# Altium PCB keybo.PcbDoc
Units mil, origin at the board's own origin, x right, y up, seen from the top; angles counter-clockwise.
Board outline 14245 x 5020 mil, 2 copper layers (Top Layer, Bottom Layer); 106 components, 46 nets, 503 pads, 18 vias.
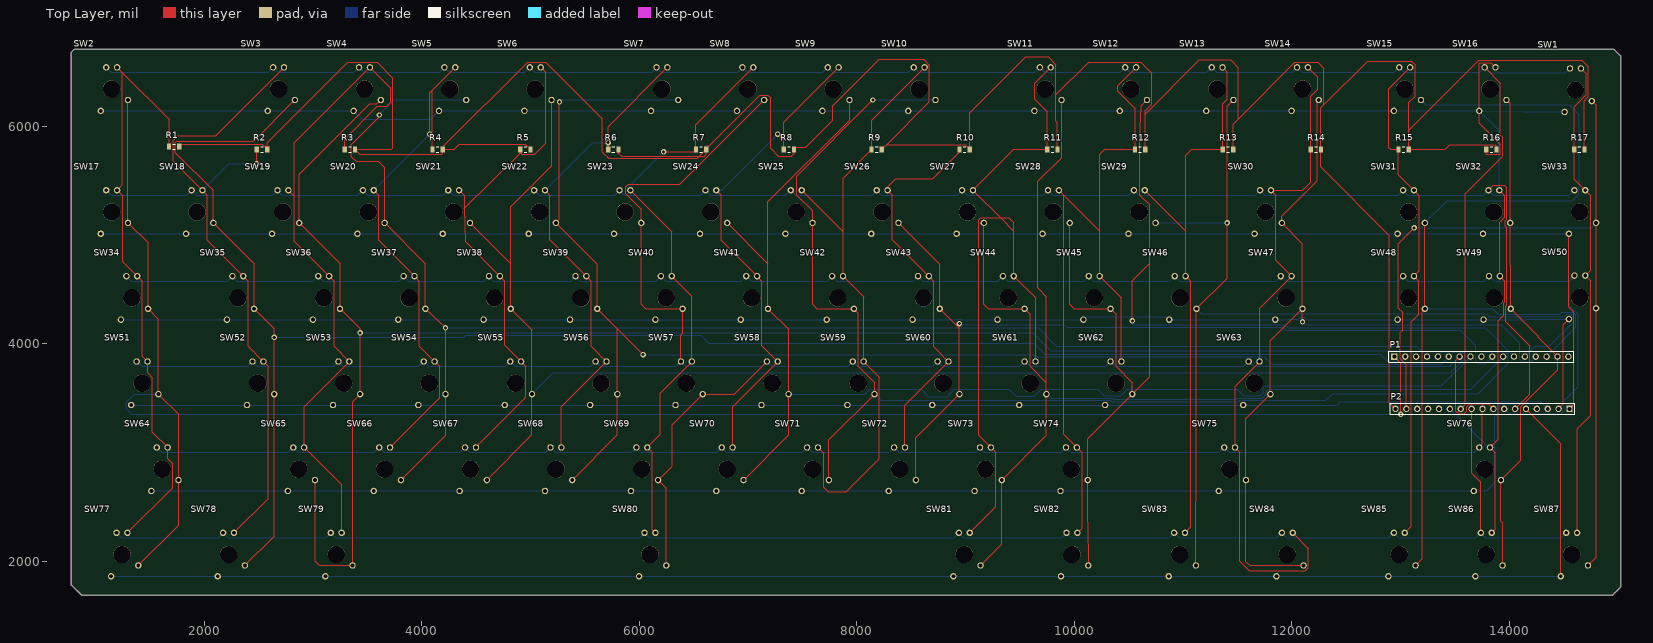
[diagram p0: Top Layer view]
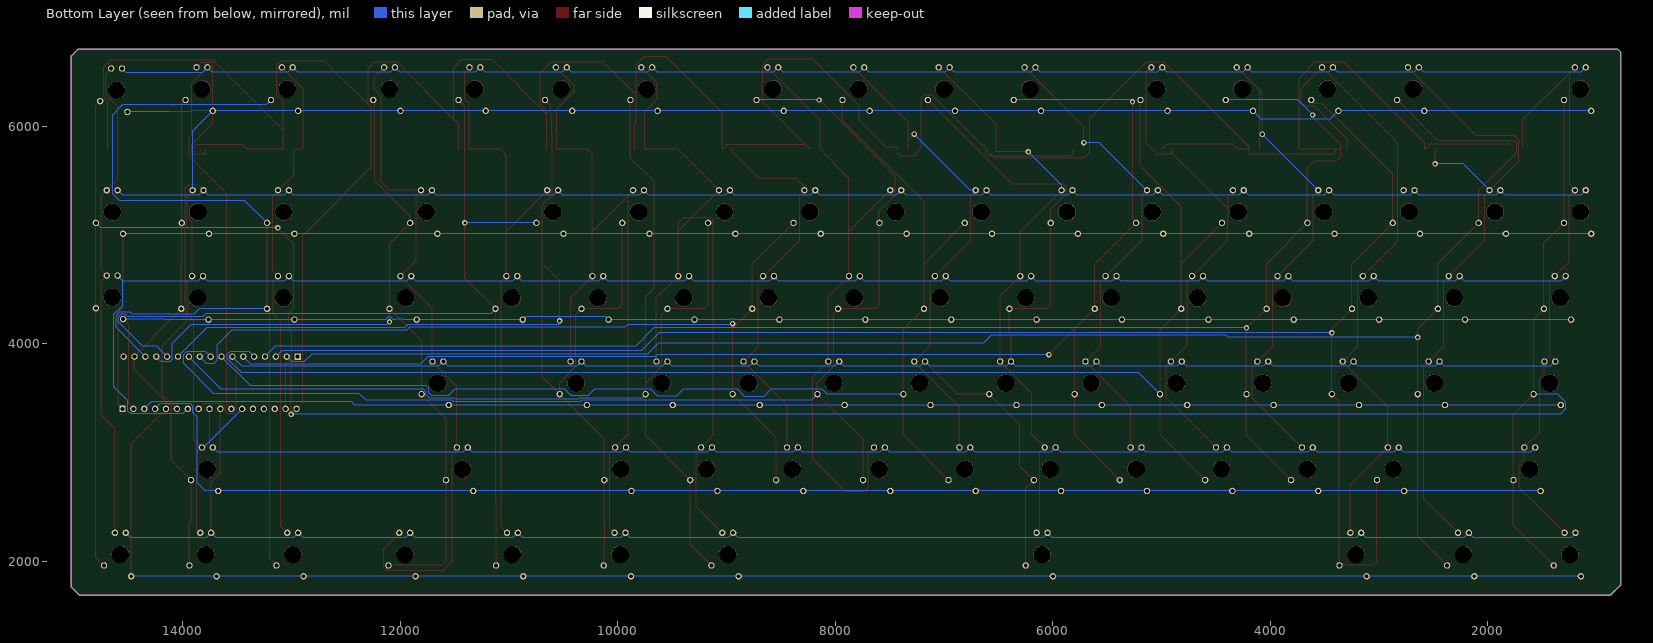
[diagram p1: Bottom Layer view, seen from below]

## Layer stack, top to bottom
Top Solder: solder mask 0.4, Solder Resist, Dk 3.5
Top Layer: signal copper 1.4
Dielectric 1: dielectric 12.6, FR-4, Dk 4.8
Bottom Layer: signal copper 1.4
Bottom Solder: solder mask 0.4, Solder Resist, Dk 3.5

## Board outline
875,1685 780,1780 780,6680 805,6705 14965,6705 15025,6645 15025,1760 14950,1685

## Design rules (kind name [scope] priority, off if disabled: settings)
Clearance [All] p1: gap=10 ignorepadtopadclearanceinfootprint=FALSE except(0: Arc-Hole Track-Hole SMDPad-Hole THPad-Hole Via-Hole Fill-Hole Poly-Hole Region-Hole Text-Hole)
PolygonConnect [All] p1: connectstyle=Relief reliefconductorwidth=10 reliefentries=4 polygonreliefangle="90 Angle" airgapwidth=10
RoutingVias [All] p1: holewidth=28 width=50 viastyle="Through Hole" minholewidth=28 minwidth=50 maxholewidth=28 maxwidth=50
SolderMaskExpansion [All] p1: expansion=4
Width [All] p1: maxlimit=10 minlimit=10 preferedwidth=10
30 further rules are at their usual default settings.

## Components (designator, comment, footprint, x,y, rotation, side; value= is the part's Value field where it differs from the comment)
P1 "Header 17" HDR1X17 12945,3880 r0 top
P2 "Header 17" HDR1X17 14555,3400 r180 top
R1 "Res" R2012 1725,5810 r0 top
R2 "Res" R2012 2532.5,5785 r0 top
R3 "Res" R2012 3340,5785 r0 top
R4 "Res" R2012 4147.5,5785 r0 top
R5 "Res" R2012 4955,5785 r0 top
R6 "Res" R2012 5762.5,5785 r0 top
R7 "Res" R2012 6570,5785 r0 top
R8 "Res" R2012 7377.5,5785 r0 top
R9 "Res" R2012 8185,5785 r0 top
R10 "Res" R2012 8992.5,5785 r0 top
R11 "Res" R2012 9800,5785 r0 top
R12 "Res" R2012 10607.5,5785 r0 top
R13 "Res" R2012 11415,5785 r0 top
R14 "Res" R2012 12222.5,5785 r0 top
R15 "Res" R2012 13030,5785 r0 top
R16 "Res" R2012 13837.5,5785 r0 top
R17 "Res" R2012 14645,5785 r0 top
SW1 "MX_SW" MX_SW-2 14610,6330 r180 top
SW2 "MX_SW" MX_SW-2 1150,6340 r180 top
SW3 "MX_SW" MX_SW-2 2685,6340 r180 top
SW4 "MX_SW" MX_SW-2 3475,6340 r180 top
SW5 "MX_SW" MX_SW-2 4260,6340 r180 top
SW6 "MX_SW" MX_SW-2 5045,6340 r180 top
SW7 "MX_SW" MX_SW-2 6210,6340 r180 top
SW8 "MX_SW" MX_SW-2 7000,6340 r180 top
SW9 "MX_SW" MX_SW-2 7785,6340 r180 top
SW10 "MX_SW" MX_SW-2 8575,6340 r180 top
SW11 "MX_SW" MX_SW-2 9735,6340 r180 top
SW12 "MX_SW" MX_SW-2 10520,6340 r180 top
SW13 "MX_SW" MX_SW-2 11315,6340 r180 top
SW14 "MX_SW" MX_SW-2 12100,6340 r180 top
SW15 "MX_SW" MX_SW-2 13040,6340 r180 top
SW16 "MX_SW" MX_SW-2 13825,6340 r180 top
SW17 "MX_SW" MX_SW-2 1150,5210 r180 top
SW18 "MX_SW" MX_SW-2 1935,5210 r180 top
SW19 "MX_SW" MX_SW-2 2725,5210 r180 top
SW20 "MX_SW" MX_SW-2 3510,5210 r180 top
SW21 "MX_SW" MX_SW-2 4295,5210 r180 top
SW22 "MX_SW" MX_SW-2 5085,5210 r180 top
SW23 "MX_SW" MX_SW-2 5870,5210 r180 top
SW24 "MX_SW" MX_SW-2 6660,5210 r180 top
SW25 "MX_SW" MX_SW-2 7445,5210 r180 top
SW26 "MX_SW" MX_SW-2 8235,5210 r180 top
SW27 "MX_SW" MX_SW-2 9020,5210 r180 top
SW28 "MX_SW" MX_SW-2 9810,5210 r180 top
SW29 "MX_SW" MX_SW-2 10600,5210 r180 top
SW30 "MX_SW" MX_SW-2 11760,5210 r180 top
SW31 "MX_SW" MX_SW-2 13075,5210 r180 top
SW32 "MX_SW" MX_SW-2 13860,5210 r180 top
SW33 "MX_SW" MX_SW-2 14650,5210 r180 top
SW34 "MX_SW" MX_SW-2 1335,4420 r180 top
SW35 "MX_SW" MX_SW-2 2310,4420 r180 top
SW36 "MX_SW" MX_SW-2 3100,4420 r180 top
SW37 "MX_SW" MX_SW-2 3885,4420 r180 top
SW38 "MX_SW" MX_SW-2 4670,4420 r180 top
SW39 "MX_SW" MX_SW-2 5465,4420 r180 top
SW40 "MX_SW" MX_SW-2 6250,4420 r180 top
SW41 "MX_SW" MX_SW-2 7035,4420 r180 top
SW42 "MX_SW" MX_SW-2 7825,4420 r180 top
SW43 "MX_SW" MX_SW-2 8615,4420 r180 top
SW44 "MX_SW" MX_SW-2 9395,4420 r180 top
SW45 "MX_SW" MX_SW-2 10185,4420 r180 top
SW46 "MX_SW" MX_SW-2 10975,4420 r180 top
SW47 "MX_SW" MX_SW-2 11950,4420 r180 top
SW48 "MX_SW" MX_SW-2 13075,4420 r180 top
SW49 "MX_SW" MX_SW-2 13865,4420 r180 top
SW50 "MX_SW" MX_SW-2 14650,4425 r180 top
SW51 "MX_SW" MX_SW-2 1430,3635 r180 top
SW52 "MX_SW" MX_SW-2 2495,3635 r180 top
SW53 "MX_SW" MX_SW-2 3285,3635 r180 top
SW54 "MX_SW" MX_SW-2 4070,3635 r180 top
SW55 "MX_SW" MX_SW-2 4865,3635 r180 top
SW56 "MX_SW" MX_SW-2 5650,3635 r180 top
SW57 "MX_SW" MX_SW-2 6435,3635 r180 top
SW58 "MX_SW" MX_SW-2 7225,3635 r180 top
SW59 "MX_SW" MX_SW-2 8015,3635 r180 top
SW60 "MX_SW" MX_SW-2 8795,3635 r180 top
SW61 "MX_SW" MX_SW-2 9595,3635 r180 top
SW62 "MX_SW" MX_SW-2 10385,3635 r180 top
SW63 "MX_SW" MX_SW-2 11655,3635 r180 top
SW64 "MX_SW" MX_SW-2 1615,2845 r180 top
SW65 "MX_SW" MX_SW-2 2870,2845 r180 top
SW66 "MX_SW" MX_SW-2 3660,2845 r180 top
SW67 "MX_SW" MX_SW-2 4450,2845 r180 top
SW68 "MX_SW" MX_SW-2 5235,2845 r180 top
SW69 "MX_SW" MX_SW-2 6025,2845 r180 top
SW70 "MX_SW" MX_SW-2 6810,2845 r180 top
SW71 "MX_SW" MX_SW-2 7595,2845 r180 top
SW72 "MX_SW" MX_SW-2 8395,2845 r180 top
SW73 "MX_SW" MX_SW-2 9185,2845 r180 top
SW74 "MX_SW" MX_SW-2 9975,2845 r180 top
SW75 "MX_SW" MX_SW-2 11430,2845 r180 top
SW76 "MX_SW" MX_SW-2 13775,2845 r180 top
SW77 "MX_SW" MX_SW-2 1245,2060 r180 top
SW78 "MX_SW" MX_SW-2 2225,2060 r180 top
SW79 "MX_SW" MX_SW-2 3215,2060 r180 top
SW80 "MX_SW" MX_SW-2 6100,2060 r180 top
SW81 "MX_SW" MX_SW-2 8990,2060 r180 top
SW82 "MX_SW" MX_SW-2 9980,2060 r180 top
SW83 "MX_SW" MX_SW-2 10970,2060 r180 top
SW84 "MX_SW" MX_SW-2 11960,2060 r180 top
SW85 "MX_SW" MX_SW-2 12990,2060 r180 top
SW86 "MX_SW" MX_SW-2 13790,2060 r180 top
SW87 "MX_SW" MX_SW-2 14575,2060 r180 top

## Footprints (in the part's own frame and the unit in brackets; to place one, negate y for a bottom-side part, rotate by r counter-clockwise, add the part's x,y. Pads: shape width x height; smd on the part's side, far side on the other; paste and mask are expansions set on the pad)
HDR1X17 [mm] "Connector; Header; 17 Position"
  rect 1.5x1.5 hole 0.9: 1(0,0)
  round 1.5 hole 0.9: 2(2.54,0) 3(5.08,0) 4(7.62,0) 5(10.16,0) 6(12.7,0) 7(15.24,0) 8(17.78,0) 9(20.32,0) 10(22.86,0) 11(25.4,0) 12(27.94,0) 13(30.48,0) 14(33.02,0) 15(35.56,0) 16(38.1,0) 17(40.64,0)
  silkscreen extent -1.27,-1.27 41.91,1.27, body extent -1.27,-1.27 41.91,1.27, height 7.58
MX_SW-2 [mm] "without Fixation pins  1-Pole w/LED"
  round 1.5 hole 0.9: 1(-3.81,2.54) 2(2.54,5.08) 3(-1.27,-5.08) 4(1.27,-5.08)
  round 4.064 hole 4.064: ""(0,0)
R2012 [mm] "Chip Resistor, 2-Leads, Body 2.0x1.2mm, IPC Low Density"
  rect 1x1.4 smd: 1(-1.2,0) 2(1.2,0)
  silkscreen extent -0.3,-0.6 0.3,0.6, body extent -0.98,-0.6 1.02,0.6, height 0.5

## Part data
P1 P2: "Header, 17-Pin", LatestRevisionDate=17-Jul-2002, LatestRevisionNote="Re-released for DXP Platform.", Publisher="Altium Limited"
R1 R2 R3 R4 R5 R6 R7 R8 R9 R10 R11 R12 R13 R14 R15 R16 R17: "贴片电阻"
SW1 SW2 SW3 SW4 SW5 SW6 SW7 SW8 SW9 SW10 SW11 SW12 SW13 SW14 SW15 SW16 SW17 SW18 SW19 SW20 SW21 SW22 SW23 SW24 SW25 SW26 SW27 SW28 SW29 SW30 SW31 SW32 SW33 SW34 SW35 SW36 SW37 SW38 SW39 SW40 SW41 SW42 SW43 SW44 SW45 SW46 SW47 SW48 SW49 SW50 SW51 SW52 SW53 SW54 SW55 SW56 SW57 SW58 SW59 SW60 SW61 SW62 SW63 SW64 SW65 SW66 SW67 SW68 SW69 SW70 SW71 SW72 SW73 SW74 SW75 SW76 SW77 SW78 SW79 SW80 SW81 SW82 SW83 SW84 SW85 SW86 SW87: library part MX_SW-2, "without Fixation pins  1-Pole w/LED"

## Via types
v1: diameter 50, hole 28, Top Layer to Bottom Layer, 18 vias

## Nets (pads, with @x,y where several pads share a name; then routed paths per layer and width w, separated by ;. In a path a pad name is that pad's centre, name@x,y a point inside that pad or via, vN(x,y) a via of type N, cw(c..) or ccw(c..) an arc to the next point about the centre after c; other vN are vias at no path point)
GND: P1.17
kcol1: P1.1 SW2.1 SW17.1 SW34.1 SW51.1 SW64.1 SW77.1 | length 17307.5
  Top Layer w10: SW2.1 SW17.1 1485,4925 SW34.1 1580,4225 SW51.1 1765,3350 SW64.1 1765,2330 SW77.1 ; P1.1 13005,3820 v1(13005,3350)
  Bottom Layer w10: SW51.1 1360,3535 1285,3460 1285,3400 1335,3350 v1(13005,3350)
kcol2: P1.2 SW3.1 SW18.1 SW35.1 SW52.1 SW78.1 | length 16166.7
  Top Layer w10: SW78.1 2645,2230 SW52.1 v1(2645,4058) 2645,4135 SW35.1 2460,4735 SW18.1 2085,5408 1737,5756 1737,5850 1747,5860 2455,5860 SW3.1
  Bottom Layer w10: v1(2645,4058) 4389.2,4058 4407.2,4076 6568,4076 6639,4005 9627,4005 9728,3904 12817,3904 12890,3831 12996,3831 P1.2
kcol3: P1.3 SW4.1 SW19.1 SW36.1 SW53.1 SW65.1 SW79.1 | length 15797.7
  Top Layer w10: SW65.1 3020,2000 3060,1960 SW79.1 3365,3465 SW53.1 v1(3435,4098) 3435,4135 SW36.1 3250,4735 SW19.1 2875,5557 3522.19,6204.19 3589.19,6204.19 SW4.1
  Bottom Layer w10: v1(3435,4098) 9620,4098 9784,3934 13091,3934 P1.3
kcol4: P1.4 SW5.1 SW20.1 SW37.1 SW54.1 SW66.1 | length 14105
  Top Layer w10: v1(3612,6102) 3612,6088 3352,5828 3352,5720 3397,5675 3600,5675 3660,5615 SW20.1 4035,4735 SW37.1 v1(4220,4143.7) SW54.1 4220,3155 SW66.1
  Bottom Layer w10: v1(3612,6102) 3750,6240 SW5.1 ; v1(4220,4143.7) 9670.3,4143.7 9838,3976 13149,3976 P1.4
kcol5: P1.5 SW6.1 SW21.1 SW38.1 SW55.1 SW67.1 | length 13456.9
  Top Layer w10: SW21.1 4820,4735 ; SW67.1 5015,3160 SW55.1 5015,4125 SW38.1 4820,4735 ; SW6.1 5195,5633 4820,5258 4820,4735
  Bottom Layer w10: SW55.1 5210,3730 13460,3730 13590,3860 13590,3900 13565,3925 13390,3925 P1.5
kcol6: P1.6 SW7.1 SW22.1 SW39.1 SW56.1 SW68.1 | length 12803.8
  Top Layer w10: v1(5268,6222) 5268,5143 SW22.1 5615,4730 SW39.1 5800,4135 ; SW68.1 5800,3160 SW56.1 5800,4135 ; v1(6037,3898) 5800,4135
  Bottom Layer w10: v1(5268,6222) 5286,6240 SW7.1 ; v1(6037,3898) 9635,3898 9653,3880 11750,3880 11819,3811 13376,3811 P1.6
kcol7: P1.7 P2.8 SW8.1 SW23.1 SW40.1 SW51.4 SW52.4 SW53.4 SW54.4 SW55.4 SW56.4 SW57.1 SW57.4 SW58.4 SW59.4 SW60.4 SW61.4 SW62.4 SW63.4 SW69.1 SW80.1 | length 19741.8
  Top Layer w10: SW80.1 6250,2670 SW69.1 6304,2874 6304,3254 SW57.1 6875,3535 SW58.4 ; SW57.4 6385,4078 6400,4093 SW40.1 6060,4320 6020,4360 SW23.1 6020,5234 5875,5379 5875,5440 5900,5465 6375,5465 SW8.1 ; P1.7 13510,3845 13510,3380 13535,3355 13585.47,3355 13610.47,3380 13610.47,3420 13635.47,3445 13810,3445 P2.8
  Bottom Layer w10: SW51.4 1425,3790 2400,3790 SW52.4 2490,3790 3190,3790 SW53.4 3280,3790 3975,3790 SW54.4 4065,3790 4770,3790 SW55.4 4860,3790 5555,3790 SW56.4 5645,3790 6340,3790 SW57.4 6430,3790 7130,3790 SW58.4 7220,3790 7920,3790 SW59.4 8010,3790 8700,3790 SW60.4 8790,3790 9500,3790 SW61.4 9590,3790 10290,3790 SW62.4 10380,3790 11560,3790 SW63.4 11650,3790 13455,3790 P1.7
kcol8: P1.8 SW9.1 SW24.1 SW41.1 SW58.1 SW70.1 | length 11235.6
  Top Layer w10: SW24.1 7185,4735 ; SW70.1 7375,3160 SW58.1 7375,4130 SW41.1 7185,4735 ; SW9.1 7935,6055 7185,5305 7185,4735
  Bottom Layer w10: SW58.1 8075,3535 8120,3580 8594,3580 8661,3513 8833,3513 8900,3580 9397,3580 9463,3514 9634,3514 9700,3580 10216.01,3580 10276.48,3519.53 10429.53,3519.53 10490,3580 11500,3580 11560.47,3519.53 11710.53,3519.53 11740.47,3549.47 11740.47,3593.44 11760.03,3613 13378,3613 P1.8
kcol9: P1.9 SW10.1 SW25.1 SW42.1 SW59.1 SW71.1 | length 11386
  Top Layer w10: SW71.1 7745,3115 SW59.1 8165,3641 8016,3790 8016,4279 SW42.1 7635,4320 7595,4360 SW25.1 7595,5220 7450,5365 7450,5540 v1(8150,6240)
  Bottom Layer w10: v1(8150,6240) SW10.1 ; SW59.1 8220.47,3479.53 10330,3479.53 10344.53,3465 11510,3465 11524.53,3479.53 12315.53,3479.53 12377,3541 13714,3541 13990,3817 13990,3900 13965,3925 13790,3925 P1.9
kcol10: P1.10 SW26.1 SW43.1 SW60.1 SW72.1 | length 7971.4
  Top Layer w10: SW26.1 8765,4730 SW43.1 8945,4140 ; SW72.1 8545,3135 SW60.1 8945,4140 ; v1(8945,4184) 8945,4140
  Bottom Layer w10: v1(8945,4184) 8954,4175 9910,4175 9935,4150 11916.41,4150 11942.76,4123.65 13551.35,4123.65 13690,3985 13690,3840 13715,3815 13780,3815 P1.10
kcol11: P1.11 SW11.1 SW27.1 SW44.1 SW61.1 SW73.1 SW81.1 | length 10951.9
  Top Layer w10: SW81.1 9335,2155 SW73.1 9745,3155 SW61.1 9745,3641 ; SW27.1 9170,4360 9210,4320 SW44.1 9596,4269 9596,3790 9745,3641 ; SW11.1 9885,5711 9665,5491 9665,4512 9745,4432 9745,3641
  Bottom Layer w10: SW61.1 9780.47,3499.53 10349.53,3499.53 10359.06,3490 11490.47,3490 11500,3499.53 11729.53,3499.53 11760.47,3530.47 11760.47,3553.44 11787.03,3580 13645,3580 P1.11
kcol12: P1.12 SW12.1 SW28.1 SW45.1 SW62.1 SW74.1 SW82.1 | length 10843.4
  Top Layer w10: SW28.1 9960,4360 10000,4320 SW45.1 10386,4269 10386,3790 10535,3641 SW62.1 ; SW82.1 10125,2358 SW74.1 10125,3125 SW62.1 ; v1(10535,4208) 10535,4579 10695,4739 ; SW12.1 10617,6187 10605,5881 10605,5365 10695,5275 10695,4739 ; SW62.1 10695,3695 10695,4739
  Bottom Layer w10: v1(10535,4208) 10535,4182 10542,4175 11931.41,4175 11962.76,4143.65 13781.35,4143.65 P1.12
kcol13: P1.13 SW13.1 SW29.1 SW46.1 SW83.1 | length 9223.5
  Top Layer w10: SW83.1 11125,3145 SW46.1 11407,4602 v1(11407,5110) 11407,6182 SW13.1
  Bottom Layer w10: SW29.1 v1(11407,5110) ; SW46.1 11170,4275 13791,4275 13819,4247 14507,4247 14529.53,4269.53 14568.44,4269.53 14594.53,4243.44 14594.53,4199.53 14371,3976 14241,3976 P1.13
kcol14: P1.14 SW14.1 SW30.1 SW47.1 SW63.1 SW75.1 SW84.1 | length 7745.4
  Top Layer w10: v1(12100,4200) SW47.1 ; SW84.1 11615,1960 11580,1995 SW75.1 11580,3310 SW63.1 11805,4025 SW47.1 ; SW14.1 12235,6225 12235,5496 11910,5171 SW30.1 12100,4920 SW47.1
  Bottom Layer w10: v1(12100,4200) 12124.53,4175.47 12180,4175.47 13926.53,4175.47 14100,4002 14100,3855 14120,3835 14200,3835 P1.14
kcol15: P1.15 SW15.1 SW31.1 SW48.1 SW85.1 | length 8876.7
  Top Layer w10: SW85.1 13200,2020 13200,4295 SW48.1 SW31.1
  Bottom Layer w10: SW15.1 13235,6195 14556,6195 14645,6106 14645,5379 14581,5315 13430,5315 SW31.1 ; SW48.1 13849.53,4320 13900,4269.53 14466.08,4269.53 14486.08,4289.53 14585,4289.53 14614.53,4260 14614.53,4149.53 P1.15
kcol16: P1.16 SW16.1 SW32.1 SW49.1 SW76.1 SW86.1 | length 4696.3
  Top Layer w10: SW86.1 13940,2353 13925,2368 SW76.1 14105,2925 14105,3419 14445,3759 P1.16 14266,4059 14266,4069 SW49.1 14015,4715 14010,4720 SW32.1 14010,6205 SW16.1
kcol17: P2.16 SW1.1 SW33.1 SW50.1 SW87.1 | length 7782.2
  Top Layer w10: P2.16 13055,3805 13000,3860 13000,4104 13020,4124 13020,4287 12980,4327 12980,4917 v1(13127,5064) ; SW87.1 14800,2035 SW50.1 SW33.1 14800,6190 SW1.1
  Bottom Layer w10: v1(13127,5064) 14754,5064 SW33.1
krow1: P2.1 SW17.2 SW18.2 SW19.2 SW20.2 SW21.2 SW22.2 SW23.2 SW24.2 SW25.2 SW26.2 SW27.2 SW28.2 SW29.2 SW30.2 SW31.2 SW32.2 SW33.2 | length 15145.2
  Top Layer w10: SW33.2 14550,4335 14595,4290 14595,3440 P2.1
  Bottom Layer w10: SW17.2 SW18.2 SW19.2 SW20.2 SW21.2 SW22.2 SW23.2 SW24.2 SW25.2 SW26.2 SW27.2 SW28.2 SW29.2 SW30.2 SW31.2 SW32.2 SW33.2
krow2: P2.2 SW34.2 SW35.2 SW36.2 SW37.2 SW38.2 SW39.2 SW40.2 SW41.2 SW42.2 SW43.2 SW44.2 SW45.2 SW46.2 SW47.2 SW48.2 SW49.2 SW50.2 | length 14228.1
  Top Layer w10: P2.2 14500,3445 14500,4175 SW50.2
  Bottom Layer w10: SW34.2 SW35.2 SW36.2 SW37.2 SW38.2 SW39.2 SW40.2 SW41.2 SW42.2 SW43.2 8922.18,4220 8926.18,4224 8963,4224 8967,4220 SW44.2 SW45.2 10113.36,4248.36 10846.64,4248.36 SW46.2 SW47.2 11963,4220 11967,4224 12042.76,4224 12046.76,4220 12063.43,4220 12083.43,4240 12116.57,4240 12136.57,4220 SW48.2 SW49.2 14158,4220 14163,4225 SW50.2
krow3: P2.3 SW51.2 SW52.2 SW53.2 SW54.2 SW55.2 SW56.2 SW57.2 SW58.2 SW59.2 SW60.2 SW61.2 SW62.2 SW63.2 | length 13064
  Bottom Layer w10: SW51.2 SW52.2 SW53.2 SW54.2 SW55.2 SW56.2 SW57.2 SW58.2 SW59.2 SW60.2 SW61.2 SW62.2 SW63.2 12420,3435 12449.53,3464.53 14290.47,3464.53 P2.3
krow4: P2.4 SW64.2 SW65.2 SW66.2 SW67.2 SW68.2 SW69.2 SW70.2 SW71.2 SW72.2 SW73.2 SW74.2 SW75.2 SW76.2 | length 13479.2
  Bottom Layer w10: SW64.2 SW65.2 SW66.2 SW67.2 SW68.2 SW69.2 SW70.2 SW71.2 SW72.2 SW73.2 SW74.2 SW75.2 SW76.2 13795,2645 13870,2720 13870,3325 13907,3362 13907,3422 13929.53,3444.53 14210.47,3444.53 P2.4
krow5: P2.5 SW77.2 SW78.2 SW79.2 SW80.2 SW81.2 SW82.2 SW83.2 SW84.2 SW85.2 SW86.2 SW87.2 | length 15002.5
  Top Layer w10: P2.5 14475,3080 SW87.2
  Bottom Layer w10: SW77.2 SW78.2 SW79.2 SW80.2 SW81.2 SW82.2 SW83.2 SW84.2 SW85.2 SW86.2 SW87.2
krow6: P2.12 R16.1 SW1.2 SW2.2 SW3.2 SW4.2 SW5.2 SW6.2 SW7.2 SW8.2 SW9.2 SW10.2 SW11.2 SW12.2 SW13.2 SW14.2 SW15.2 SW16.2 SW16.3 SW32.3 SW49.3 SW76.3 SW86.3 | length 19418.3
  Top Layer w10: R16.1 13790.26,5742 13919.43,5742 13919.43,5831.57 13725,6026 SW16.2 13725,6579.53 13730,6584.53 13830.47,6584.53 SW16.3 ; SW86.3 13874,2294 13874,2996 SW76.3 13900,3120 13900,4210 13950.47,4260.47 13950.47,4375 13960,4384.53 13960,4575 SW49.3 13915,5118.02 13959,5162.02 13959,5361 SW32.3
  Bottom Layer w10: SW2.2 SW3.2 SW4.2 3453,6062 4082,6062 SW5.2 SW6.2 SW7.2 SW8.2 SW9.2 SW10.2 SW11.2 SW12.2 SW13.2 SW14.2 SW15.2 SW16.2 ; P2.12 13790,3065 13790,3045 SW76.3 ; SW32.3 13910,5955 SW16.2 ; SW1.2 14128,6130 SW16.2
lrow1: P2.6 SW17.4 SW18.4 SW19.4 SW20.4 SW21.4 SW22.4 SW23.4 SW24.4 SW25.4 SW26.4 SW27.4 SW28.4 SW29.4 SW30.4 SW31.4 SW32.4 SW33.4 | length 16487.5
  Top Layer w10: SW32.4 13855,5455 13955,5455 13979,5431 13979,5142 13965.47,5128.47 13965.47,5078.53 13980,5064 13980,4354.53 13970.47,4345 13970.47,4199.53 14190,3980 14190,3535 P2.6
  Bottom Layer w10: SW17.4 1145,5365 1840,5365 SW18.4 1930,5365 2630,5365 SW19.4 2720,5365 3415,5365 SW20.4 3505,5365 4200,5365 SW21.4 4290,5365 4990,5365 SW22.4 5080,5365 5775,5365 SW23.4 5865,5365 6565,5365 SW24.4 6655,5365 7350,5365 SW25.4 7440,5365 8140,5365 SW26.4 8230,5365 8925,5365 SW27.4 9015,5365 9715,5365 SW28.4 9805,5365 10505,5365 SW29.4 10595,5365 11665,5365 SW30.4 11755,5365 12980,5365 SW31.4 13070,5365 13765,5365 SW32.4 13855,5365 14555,5365 SW33.4
lrow2: P2.7 SW34.4 SW35.4 SW36.4 SW37.4 SW38.4 SW39.4 SW40.4 SW41.4 SW42.4 SW43.4 SW44.4 SW45.4 SW46.4 SW47.4 SW48.4 SW49.4 SW50.4 | length 15849
  Bottom Layer w10: SW34.4 1330,4575 2215,4575 SW35.4 2305,4575 3005,4575 SW36.4 3095,4575 3790,4575 SW37.4 3880,4575 4575,4575 SW38.4 4665,4575 5370,4575 SW39.4 5460,4575 6155,4575 SW40.4 6245,4575 6940,4575 SW41.4 7030,4575 7730,4575 SW42.4 7820,4575 8520,4575 SW43.4 8610,4575 9300,4575 SW44.4 9390,4575 10090,4575 SW45.4 10180,4575 10880,4575 SW46.4 10970,4575 11855,4575 SW47.4 11945,4575 12980,4575 SW48.4 13070,4575 13770,4575 SW49.4 13864,4571 14555,4571 ; P2.7 14000,3355 14480,3355 14505,3380 14505,3473 14634.53,3602.53 14634.53,4269.53 14555,4349.06 14555,4571 ; 14555,4571 14555,4580 SW50.4 14555,4571
lrow4: P2.9 SW64.4 SW65.4 SW66.4 SW67.4 SW68.4 SW69.4 SW70.4 SW71.4 SW72.4 SW73.4 SW74.4 SW75.4 SW76.4 | length 12974.8
  Top Layer w10: SW76.4 13755,3075 P2.9
  Bottom Layer w10: SW64.4 1610,3000 2775,3000 SW65.4 2865,3000 3565,3000 SW66.4 3655,3000 4355,3000 SW67.4 4445,3000 5140,3000 SW68.4 5230,3000 5930,3000 SW69.4 6020,3000 6715,3000 SW70.4 6805,3000 7500,3000 SW71.4 7590,3000 8300,3000 SW72.4 8390,3000 9090,3000 SW73.4 9180,3000 9880,3000 SW74.4 9970,3000 11335,3000 SW75.4 11425,3000 13680,3000 SW76.4
lrow5: P2.10 SW77.4 SW78.4 SW79.4 SW80.4 SW81.4 SW82.4 SW83.4 SW84.4 SW85.4 SW86.4 SW87.4 | length 14878
  Top Layer w10: P2.10 13655,2808 13740,2723 SW86.4
  Bottom Layer w10: SW77.4 1240,2215 2130,2215 SW78.4 2220,2215 3120,2215 SW79.4 3210,2215 6005,2215 SW80.4 6095,2215 8895,2215 SW81.4 8985,2215 9885,2215 SW82.4 9975,2215 10875,2215 SW83.4 10965,2215 11865,2215 SW84.4 11955,2215 12895,2215 SW85.4 12985,2215 13695,2215 SW86.4 13785,2215 14480,2215 SW87.4
lrow6: P2.11 SW1.4 SW2.4 SW3.4 SW4.4 SW5.4 SW6.4 SW7.4 SW8.4 SW9.4 SW10.4 SW11.4 SW12.4 SW13.4 SW14.4 SW15.4 SW16.4 | length 17385.7
  Top Layer w10: P2.11 13595,3440 13595,5376.91 13939.43,5721.34 13939.43,5895.54 13920,5914.97 13920,6395 SW16.4
  Bottom Layer w10: SW2.4 1145,6495 2590,6495 SW3.4 2680,6495 3380,6495 SW4.4 3470,6495 4165,6495 SW5.4 4255,6495 4950,6495 SW6.4 5040,6495 6115,6495 SW7.4 6205,6495 6905,6495 SW8.4 6995,6495 7690,6495 SW9.4 7780,6495 8480,6495 SW10.4 8570,6495 9640,6495 SW11.4 9730,6495 10425,6495 SW12.4 10515,6495 11220,6495 SW13.4 11310,6495 12005,6495 SW14.4 12095,6495 12945,6495 SW15.4 13035,6495 13730,6495 SW16.4 13824,6491 14521,6491 SW1.4
NetR1_1: R1.1 SW2.3 SW17.3 SW34.3 SW51.3 SW64.3 SW77.3 | length 5562.3
  Top Layer w10: SW2.3 1249,6491 ; SW77.3 1710,2675 1710,2895 1665,2940 SW64.3 1525,3185 1525,3685 1480,3730 SW51.3 1430,3885 1430,4575 SW34.3 1251,4754 1251,5359 SW17.3 1249,5459 1249,6491 ; R1.1 1677.76,6062.24 1249,6491
NetR2_1: R2.1 SW3.3 SW18.3 SW35.3 SW52.3 SW78.3 | length 6131.6
  Top Layer w10: SW78.3 2590,2575 2590,3790 SW52.3 2405,3975 2405,4575 SW35.3 2030,4950 2030,5365 SW18.3 1717,5678 1717,5870 1760,5913 2108,5913 SW3.3 ; R2.1 2485.26,5653.74 v1(2486,5653)
  Bottom Layer w10: SW18.3 2228,5653 v1(2486,5653)
NetR3_1: R3.1 SW4.3 SW19.3 SW36.3 SW53.3 SW65.3 SW79.3 | length 6228.8
  Top Layer w10: SW19.3 2830,5355 ; SW79.3 3265,2700 SW65.3 2920,3420 SW53.3 3195,3975 3195,4575 SW36.3 2830,4940 2830,5355 ; R3.1 3292.76,5881 3593.76,6182 3680,6182 3715,6217 3715,6350 SW4.3 2830,5845 2830,5355
NetR4_1: R4.1 SW5.3 SW20.3 SW37.3 SW54.3 SW66.3 | length 4790
  Top Layer w10: SW20.3 3605,5365 3605,4950 SW37.3 3980,4575 3980,3975 SW54.3 4165,3790 4165,3500 SW66.3 ; v1(4075,5925) 4075,6305 4100.26,6330.26 ; R4.1 4100.26,6330.26 ; SW5.3 4100.26,6330.26
  Bottom Layer w10: SW20.3 v1(4075,5925)
NetR5_1: R5.1 SW6.3 SW21.3 SW38.3 SW55.3 SW67.3 | length 4897.7
  Top Layer w10: SW21.3 4390,5365 4392.87,5243.06 ; SW67.3 4960,3505 4960,3790 SW55.3 4765,3985 4765,4575 SW38.3 4400,4940 ; SW6.3 5140,6495 5140,5840 5040,5740 4917.75,5740 R5.1 4908.76,5749 4392.87,5243.06 ; 4392.87,5243.06 4400,4940 ; 4392.87,5243.06 4390,5240.24 4400,4940
NetR6_1: R6.1 SW7.3 SW22.3 SW39.3 SW56.3 SW68.3 | length 4513.3
  Top Layer w10: SW22.3 5180,5365 5180,4955 SW39.3 5560,4575 5560,3975 SW56.3 5285,3420 SW68.3 ; R6.1 5715.26,5813.26 v1(5715.26,5848) 5715.26,5995.26 SW7.3
  Bottom Layer w10: SW22.3 5573,5848 v1(5715.26,5848)
NetR7_1: R7.1 SW8.3 SW23.3 SW40.3 SW57.3 SW69.3 SW80.3 | length 5356.8
  Top Layer w10: SW23.3 6300,5030 SW40.3 6485,4435 SW57.3 6195,3545 6195,3165 SW69.3 6120,3000 6120,2290 SW80.3 ; v1(6226,5763) 6522.76,5763 R7.1 6522.76,6012.76 SW8.3
  Bottom Layer w10: SW23.3 5920,5457 v1(6226,5763)
NetR8_1: R8.1 SW9.3 SW24.3 SW41.3 SW58.3 SW70.3 | length 4591.9
  Top Layer w10: SW24.3 6755,5365 6755,4950 SW41.3 7130,4575 7130,3980 SW58.3 6860,3420 SW70.3 ; v1(7275,5926) 7330.26,5870.74 ; R8.1 7330.26,5870.74 ; SW9.3 7330.26,6035.26 7330.26,5870.74
  Bottom Layer w10: SW24.3 6759,5410 v1(7275,5926)
NetR9_1: R9.1 SW10.3 SW25.3 SW42.3 SW59.3 SW71.3 | length 5625.1
  Top Layer w10: SW25.3 7875,5030 ; SW71.3 7700,2990 7700,2680 7741,2639 7907,2639 8210,2942 8210,3690 SW59.3 8065,4430 SW42.3 7875,5030 ; SW10.3 8137.76,6052.76 R9.1 7875,5522.24 7875,5030
NetR10_1: R10.1 SW26.3 SW43.3 SW60.3 SW72.3 | length 3609.9
  Top Layer w10: SW72.3 8445,3435 SW60.3 8710,3970 8710,4575 SW43.3 8330,4955 8330,5365 SW26.3 8285,5440 8359,5514 8698.26,5514 8945.26,5761 R10.1
NetR11_1: R11.1 SW11.3 SW27.3 SW44.3 SW61.3 SW73.3 SW81.3 | length 6976.5
  Top Layer w10: SW81.3 9280,2500 9280,3000 SW73.3 9125,3155 9125,5140 9140,5155 9325,5155 ; SW61.3 9645,4420 SW44.3 9445,5035 ; SW11.3 9640,6395 9640,6245 9752.76,6132.24 R11.1 9445,5785 SW27.3 9325,5155 ; 9325,5155 9445,5035 ; 9325,5155 9400,5155 9445,5110 9445,5035
NetR12_1: R12.1 SW12.3 SW28.3 SW45.3 SW62.3 SW74.3 SW82.3 | length 6947.1
  Top Layer w10: SW28.3 9905,5365 ; SW82.3 10074,2304 10074,2996 SW74.3 9905,3165 9905,5365 ; SW62.3 10435,4420 SW45.3 10235,5035 ; SW12.3 10400,6370 10400,6320 10560.26,6159.74 R12.1 10280,5785 10235,5740 10235,5035 ; 9905,5365 10235,5035
NetR13_1: R13.1 SW13.3 SW29.3 SW46.3 SW83.3 | length 5199.7
  Top Layer w10: SW29.3 11025,5035 ; SW83.3 11074,2314 11074,4571 SW46.3 11025,5035 ; SW13.3 11410,6495 11410,6247 11367.76,6204.76 R13.1 11080,5785 11025,5730 11025,5035
NetR14_1: R14.1 SW14.3 SW30.3 SW47.3 SW63.3 SW75.3 SW84.3 | length 6299.9
  Top Layer w10: SW84.3 12155,2115 12155,1940 12127,1912 11610,1912 11525,1997 11525,3000 SW75.3 11480,3610 SW63.3 11705,4325 SW47.3 11855,4765 11855,5365 SW30.3 12103.43,5410 12175.26,5481.83 R14.1 12175.26,6275.26 12240,6340 12240,6450 SW14.3
NetR15_1: R15.1 SW15.3 SW31.3 SW48.3 SW85.3 | length 4611.7
  Top Layer w10: SW85.3 13100,2320 13100,4200 13170,4270 13170,4575 SW48.3 13174,4669 13174,5361 SW31.3 12982.76,5552.24 R15.1 12910,5785 12895,5800 12895,6345 SW15.3
NetR17_1: R17.1 SW1.3 SW33.3 SW50.3 SW87.3 | length 4491
  Top Layer w10: SW87.3 14625,3218 14749,3342 14749,4576 SW50.3 14749,4674 14749,5361 SW33.3 14597.76,5512.24 R17.1 14597.76,6176.81 14709,6288.06 14709,6481 SW1.3
VCC: P2.17 R1.2 R2.2 R3.2 R4.2 R5.2 R6.2 R7.2 R8.2 R9.2 R10.2 R11.2 R12.2 R13.2 R14.2 R15.2 R16.2 R17.2 | length 30044.7
  Top Layer w10: R1.2 1794.24,5832 2532.74,5832 R2.2 2579.74,5844.74 3320,6585 3590,6585 3735,6440 3735,5797 3723,5785 R3.2 3433.24,5739 4183.74,5739 4194.74,5750 R4.2 ; R5.2 4955.24,5832 4347,5832 4300,5785 R4.2 ; R6.2 5809.74,5752.26 5839.05,5722.95 6555.19,5722.95 ; R9.2 8275.24,5828 ; R11.2 9847.24,6025 9830,6042.24 9830,6290 ; R12.2 10654.74,6109.74 ; R13.2 11462.24,6017.24 11509.88,6064.88 ; P2.17 12900,3455 12900,4993.74 12269.74,5624 R14.2 12269.74,6169.74 12295,6195 ; R16.2 13884.74,5813.26 13870,5828 13455,5828 13412,5785 R15.2 13077.24,5961.24 ; R17.2 14692.24,6231.77 14729,6268.53 14729,6545 14669.47,6604.53 13720.53,6604.53 13077.24,5961.24 ; R4.2 4194.74,5809.74 4974,6589 5143,6589 5663,6069 5663,5760 5719,5704 6536.24,5704 6555.19,5722.95 ; 6555.19,5722.95 R7.2 ; 6555.19,5722.95 6600.19,5722.95 6617.24,5740 R7.2 ; R7.2 6617.24,5820 6645,5820 7110,6285 7184,6285 7209,6260 7209,5795 7280,5724 7400,5724 7424.74,5748.74 R8.2 7424.74,5805 7531,5805 7780,6054 7780,6185 8208,6613 8617,6613 8670,6560 8670,6222.76 8275.24,5828 ; 8275.24,5828 8996.74,5828 R10.2 9039.74,6120.74 9555,6636 9760,6636 9830,6566 9830,6290 ; 9830,6290 10135,6585 10615,6585 10715,6485 10715,6200 10654.74,6139.74 10654.74,6109.74 ; 10654.74,6109.74 11153,6608 11440,6608 11510,6538 11509.88,6064.88 ; 11509.88,6064.88 12030,6585 12240,6585 12295,6530 12295,6195 ; 12295,6195 12698,6598 13100,6598 13135,6563 13135,6276 13077.24,6218.24 13077.24,5961.24
pads on no net: P2.13 P2.14 P2.15 SW1. SW2. SW3. SW4. SW5. SW6. SW7. SW8. SW9. SW10. SW11. SW12. SW13. SW14. SW15. SW16. SW17. SW18. SW19. SW20. SW21. SW22. SW23. SW24. SW25. SW26. SW27. SW28. SW29. SW30. SW31. SW32. SW33. SW34. SW35. SW36. SW37. SW38. SW39. SW40. SW41. SW42. SW43. SW44. SW45. SW46. SW47. SW48. SW49. SW50. SW51. SW52. SW53. SW54. SW55. SW56. SW57. SW58. SW59. SW60. SW61. SW62. SW63. SW64. SW65. SW66. SW67. SW68. SW69. SW70. SW71. SW72. SW73. SW74. SW75. SW76. SW77. SW78. SW79. SW80. SW81. SW82. SW83. SW84. SW85. SW86. SW87.

## Keep-outs
Keep-Out Layer:
  the board outline again, w10

## Silkscreen, mask and mechanical layers (free items; w line width, h text height)
Mechanical 1:
  drawing of 1944 lines, arcs and shapes, not listed